# Altium PCB AVR_ISP_Adaptor.PcbDoc
Units mil, origin at the board's own origin, x right, y up, seen from the top; angles counter-clockwise.
Board outline 700 x 700 mil, 2 copper layers (Top Layer, Bottom Layer); 2 components, 6 nets, 14 pads, 0 vias.
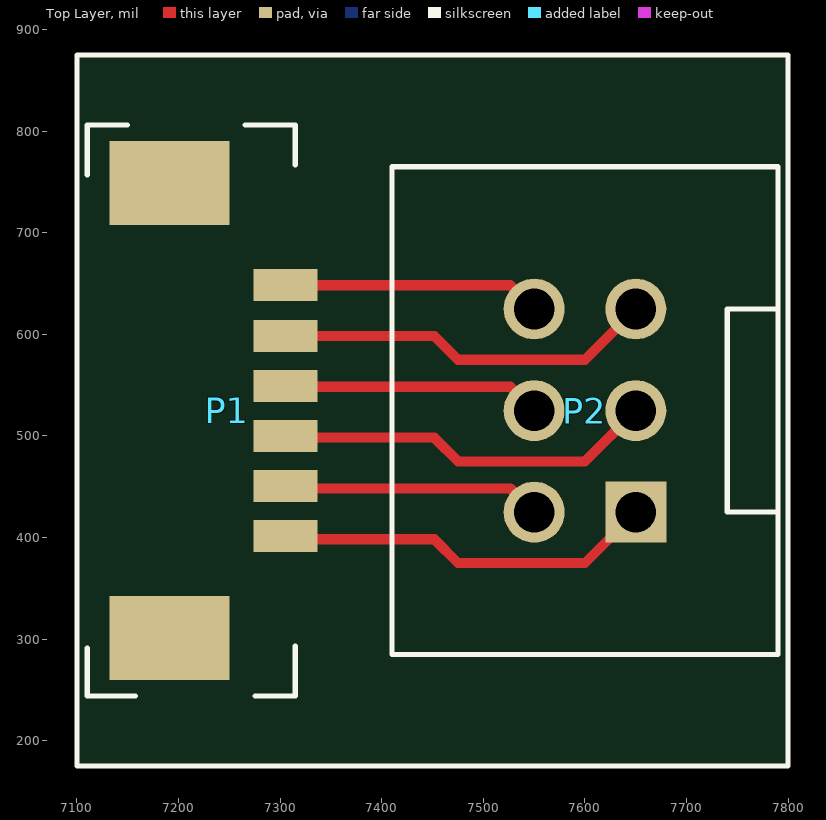
[diagram p0: Top Layer view]
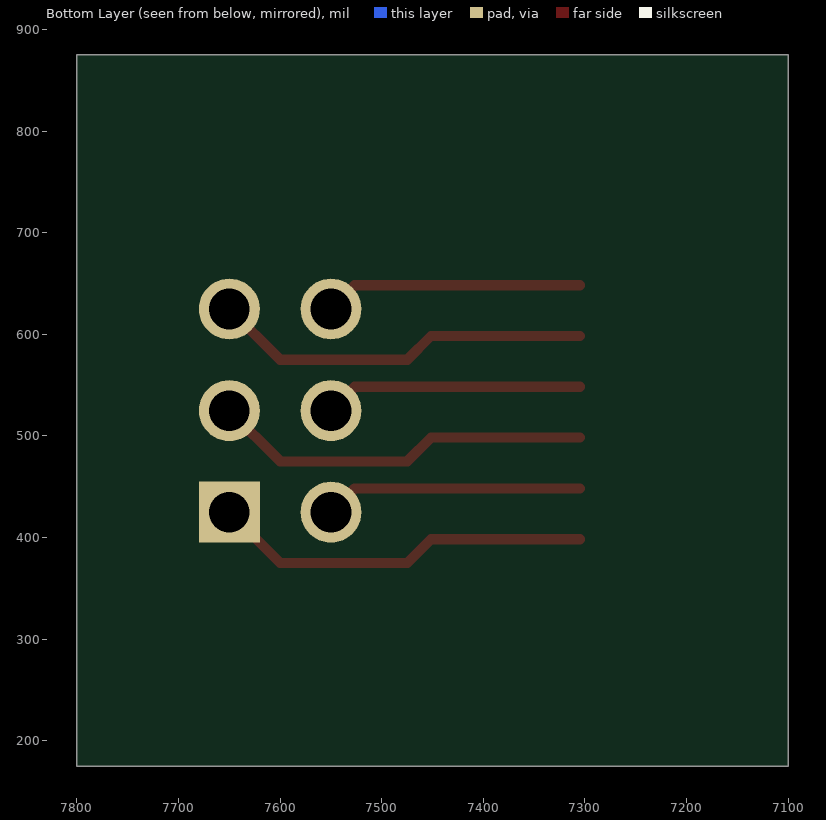
[diagram p1: Bottom Layer view, seen from below]

## Layer stack, top to bottom
Top Layer: signal copper 1.4
Dielectric: dielectric 12.6, FR-4, Dk 4.8
Bottom Layer: signal copper 1.4

## Board outline
7100,875 7100,175 7800,175 7800,875

## Design rules (kind name [scope] priority, off if disabled: settings)
Clearance [All] p1: gap=8
PolygonConnect [All] p1: connectstyle=Relief reliefconductorwidth=10 reliefentries=4 polygonreliefangle="90 Angle"
RoomDefinition AVR_ISP_Adaptor [InComponentClass('AVR_ISP_Adaptor')] p1: confinementstyle=ConfineIn formatcopy=TRUE lockcomponents=FALSE outline 7100,175 7800,175 7800,875 7100,875
RoutingVias [All] p1: holewidth=28 width=50 viastyle="Through Hole" minholewidth=28 minwidth=50 maxholewidth=28 maxwidth=50
SilkscreenOverComponentPads [All] p1: minsilkscreentomaskgap=10
SolderMaskExpansion [All] p1: expansion=4
Width [All] p1: maxlimit=10 minlimit=10 preferedwidth=10
27 further rules are at their usual default settings.

## Components (designator, comment, footprint, x,y, rotation, side; value= is the part's Value field where it differs from the comment)
P1 "53261-0671" 53261-0671 7305,525 r270 top
P2 "75869-131LF" 75869-131LF 7650,425 r90 top

## Footprints (in the part's own frame and the unit in brackets; to place one, negate y for a bottom-side part, rotate by r counter-clockwise, add the part's x,y. Pads: shape width x height; smd on the part's side, far side on the other; paste and mask are expansions set on the pad)
53261-0671 [mm] "CONN HEADER 6POS 1.25MM R/A SMD"
  rect 2.1x3 smd: 0(-5.685,-2.9) 0(5.685,-2.9)
  rect 0.8x1.6 smd: 1(3.135,0) 2(1.885,0) 3(0.635,0) 4(-0.615,0) 5(-1.865,0) 6(-3.135,0)
  silkscreen extent -7.13,-4.95 7.13,0.25, body extent -7.11,-4.95 7.11,0.25, height 3.4
75869-131LF [mil] "CONN HEADER 6POS DUAL VERT PCB"
  rect 60x60 hole 40: 1(0,0)
  round 60 hole 40: 2(0,100) 3(100,0) 4(100,100) 5(200,0) 6(200,100)
  silkscreen extent -140,-140 340,240, body extent -140,-140 340,240, height 377

## Part data
P1: "CONN HEADER 6POS 1.25MM R/A SMD"
P2: "CONN HEADER 6POS DUAL VERT PCB"

## Nets (pads, with @x,y where several pads share a name; then routed paths per layer and width w, separated by ;. In a path a pad name is that pad's centre, name@x,y a point inside that pad or via, vN(x,y) a via of type N, cw(c..) or ccw(c..) an arc to the next point about the centre after c; other vN are vias at no path point)
NetP1_1: P1.1 P2.1 | length 375.4
  Top Layer w10: P1.1@7305,398.43 7451.57,398.43 7475,375 7600,375 P2.1
NetP1_2: P1.2 P2.2 | length 254.7
  Top Layer w10: P1.2@7305,448.43 7526.57,448.43 P2.2
NetP1_3: P1.3 P2.3 | length 375.4
  Top Layer w10: P1.3@7305,498.43 7451.57,498.43 7475,475 7600,475 P2.3
NetP1_4: P1.4 P2.4 | length 254.7
  Top Layer w10: P1.4@7305,548.43 7526.57,548.43 P2.4
NetP1_5: P1.5 P2.5 | length 375.4
  Top Layer w10: P1.5 7451.57,598.43 7475,575 7600,575 P2.5
NetP1_6: P1.6 P2.6 | length 254.7
  Top Layer w10: P1.6 7526.57,648.43 P2.6
pads on no net: P1.0

## Silkscreen, mask and mechanical layers (free items; w line width, h text height)
Top Overlay:
  the board outline again, w5